# Altium PCB PCBProject_AdapterBoard_GaN.PcbDoc
Units mil, origin at the board's own origin, x right, y up, seen from the top; angles counter-clockwise.
Board outline 3052.53 x 2065.03 mil, 2 copper layers (Top Layer, Bottom Layer); 6 components, 24 nets, 122 pads, 11 vias.
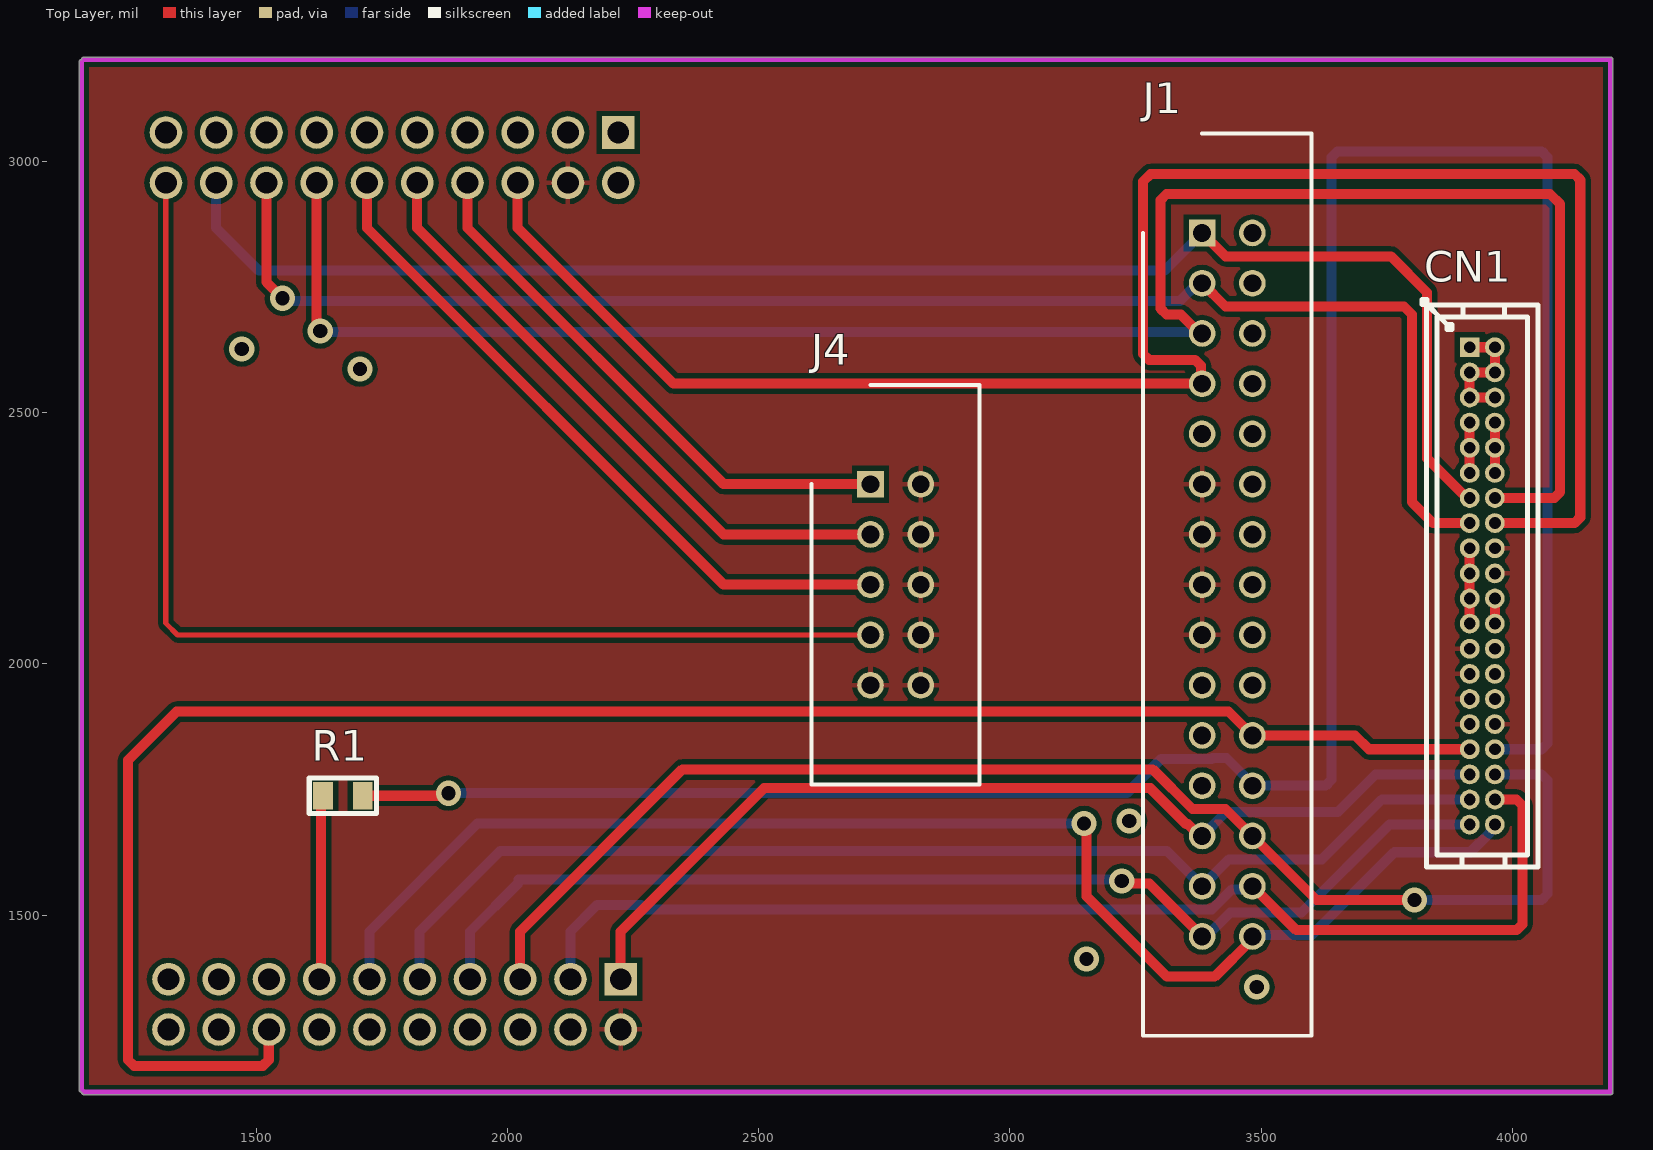
[diagram p0: Top Layer view]
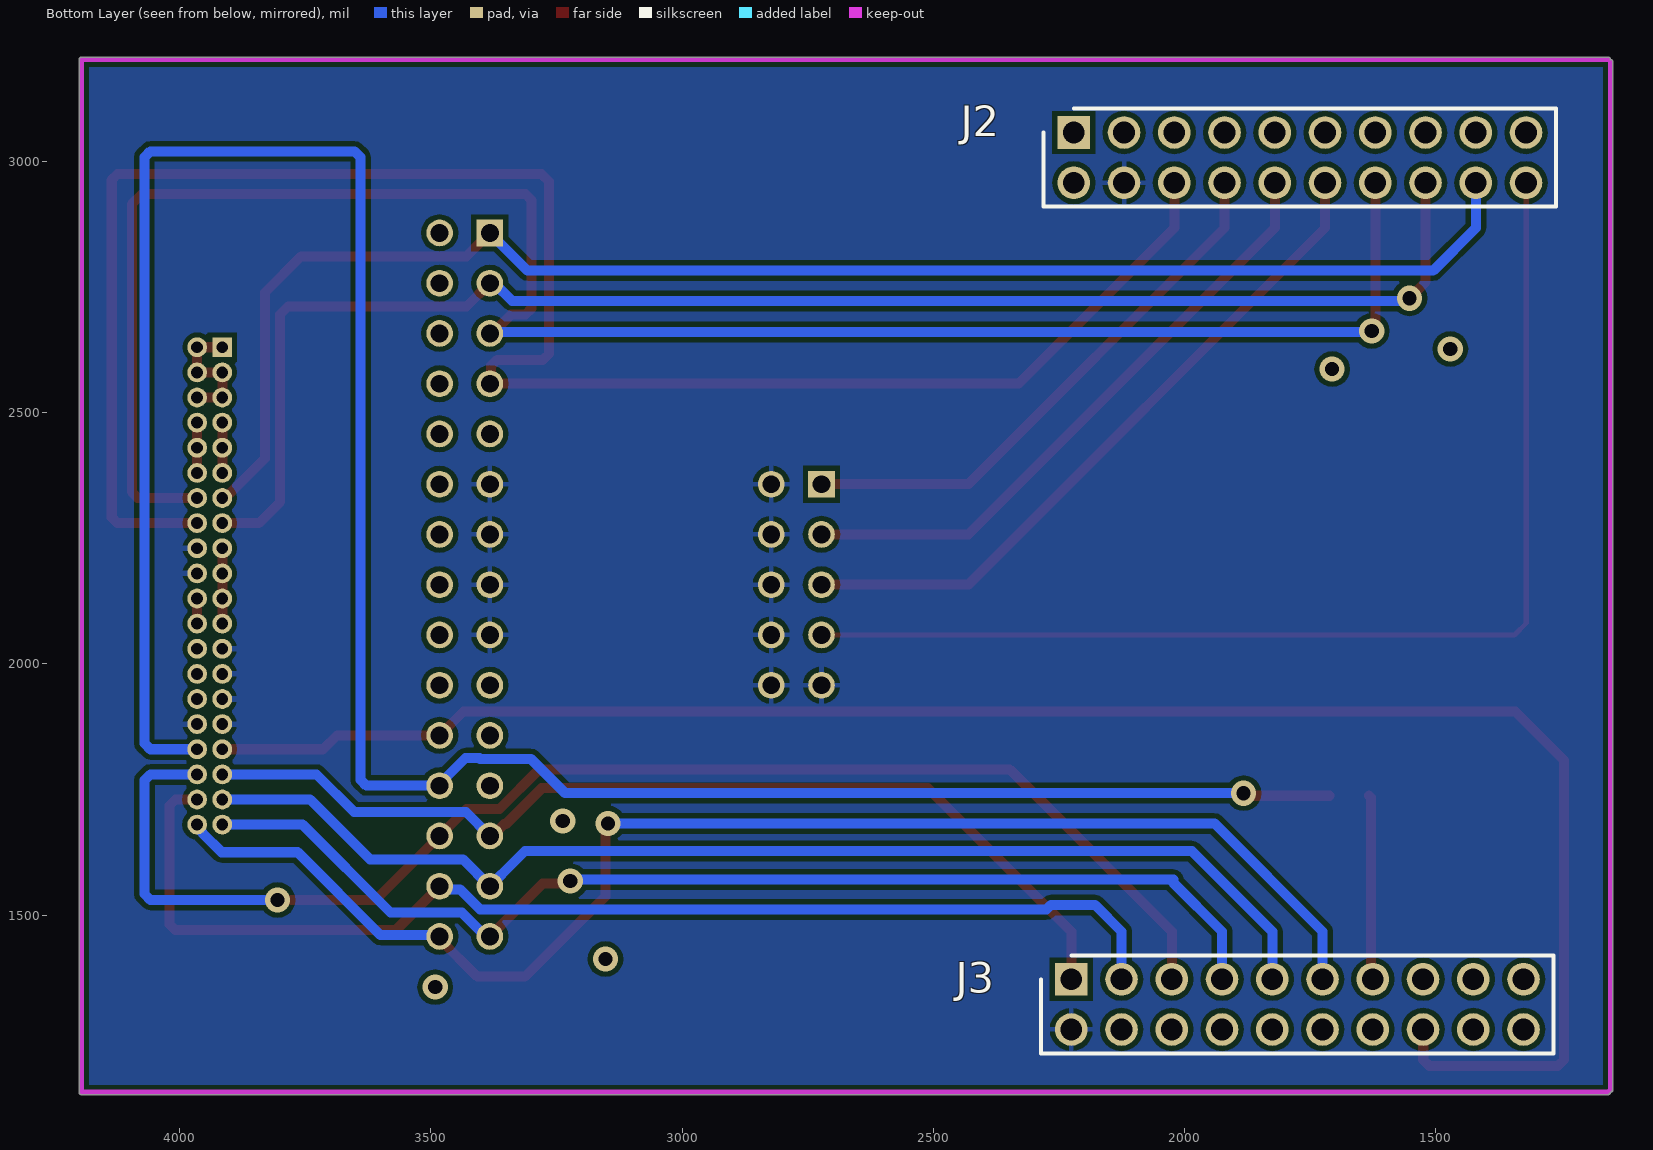
[diagram p1: Bottom Layer view, seen from below]

## Layer stack, top to bottom
Top Solder: solder mask 0.4, Solder Resist, Dk 3.5
Top Layer: signal copper 1.4
Dielectric 1: dielectric 12.6, FR-4, Dk 4.8
Bottom Layer: signal copper 1.4
Bottom Solder: solder mask 0.4, Solder Resist, Dk 3.5

## Board outline
1152.48,1147.48 cw(c1152.5,1152.5) 1147.48,1152.5 1147.48,3197.5 cw(c1152.5,3197.5) 1152.48,3202.51 cw(c1157.5,3202.5) 1157.5,3207.51 4195,3207.51 cw(c4195,3202.5) 4200.01,3202.5 4200.02,1147.5 cw(c4195,1147.5) 4195,1142.48 1157.5,1142.48 cw(c1157.5,1147.5)

## Design rules (kind name [scope] priority, off if disabled: settings)
Clearance [All] p1: gap=10 ignorepadtopadclearanceinfootprint=FALSE
MinimumSolderMaskSliver [All] p1: minsoldermaskwidth=2
PolygonConnect [All] p1: connectstyle=Relief reliefconductorwidth=10 reliefentries=4 polygonreliefangle="90 Angle" airgapwidth=10
RoutingVias [All] p1: holewidth=28 width=50 viastyle="Through Hole" minholewidth=28 minwidth=50 maxholewidth=28 maxwidth=50
SilkToSolderMaskClearance [IsPad] p1: minsilkscreentomaskgap=2 clearancetoexposedcopper=TRUE
SolderMaskExpansion [All] p1: expansion=4 istentingtop=FALSE
Width [All] p1: maxlimit=30 minlimit=10 preferedwidth=20
28 further rules are at their usual default settings.

## Classes and differential pairs
component class PCBProject_AdapterBoard_GaN: CN1 J2 J3 J4 R1

## Components (designator, comment, footprint, x,y, rotation, side; value= is the part's Value field where it differs from the comment)
CN1 "3131-40SG0BK00T1" IDC-TH_3131-40SG0BK00T1 3940,2155 r270 top
J1 "HIF3FC-30PA-2.54DSA_71_" SHDR30W50P254_2X15_4560X850X1200P 3382.5,2857.5 r270 top
J2 "SSQ-110-03-T-D-017" RHDR20W64P254_2X10_2591X495X851P 2220.4,3057.33 r0 bottom
J3 "SSQ-110-03-T-D-017" RHDR20W64P254_2X10_2591X495X851P 2225.4,1372.33 r0 bottom
J4 "HIF3FC-10PA-2.54DSA_71_" SHDR10W50P254_2X5_2020X850X920P 2722.5,2357.5 r270 top
R1 "0R" 0805 1672.5,1737.5 r180 top value=470R

## Footprints (in the part's own frame and the unit in brackets; to place one, negate y for a bottom-side part, rotate by r counter-clockwise, add the part's x,y. Pads: shape width x height; smd on the part's side, far side on the other; paste and mask are expansions set on the pad)
0805 [mm]
  rect 1x1.4 smd: 1(-1,0) 2(1,0)
  silkscreen extent -1.7,-0.9 1.7,0.9
IDC-TH_3131-40SG0BK00T1 [mm]
  rect 1x1 hole 0.6: 1(-12.065,-0.635)
  round 1 hole 0.6: 2(-12.065,0.635) 3(-10.795,-0.635) 4(-10.795,0.635) 5(-9.525,-0.635) 6(-9.525,0.635) 7(-8.255,-0.635) 8(-8.255,0.635) 9(-6.985,-0.635) 10(-6.985,0.635) 11(-5.715,-0.635) 12(-5.715,0.635) 13(-4.445,-0.635) 14(-4.445,0.635) 15(-3.175,-0.635) 16(-3.175,0.635) 17(-1.905,-0.635) 18(-1.905,0.635) 19(-0.635,-0.635) 20(-0.635,0.635) 21(0.635,-0.635) 22(0.635,0.635) 23(1.905,-0.635) 24(1.905,0.635) 25(3.175,-0.635) 26(3.175,0.635) 27(4.445,-0.635) 28(4.445,0.635) 29(5.715,-0.635) 30(5.715,0.635) 31(6.985,-0.635) 32(6.985,0.635) 33(8.255,-0.635) 34(8.255,0.635) 35(9.525,-0.635) 36(9.525,0.635) 37(10.795,-0.635) 38(10.795,0.635) 39(12.065,-0.635) 40(12.065,0.635)
  silkscreen extent -14.48,-3.05 14.2,2.82
RHDR20W64P254_2X10_2591X495X851P [mm]
  rect 1.65x1.65 hole 1.1: 1(0,0)
  round 1.65 hole 1.1: 2(0,2.54) 3(-2.54,0) 4(-2.54,2.54) 5(-5.08,0) 6(-5.08,2.54) 7(-7.62,0) 8(-7.62,2.54) 9(-10.16,0) 10(-10.16,2.54) 11(-12.7,0) 12(-12.7,2.54) 13(-15.24,0) 14(-15.24,2.54) 15(-17.78,0) 16(-17.78,2.54) 17(-20.32,0) 18(-20.32,2.54) 19(-22.86,0) 20(-22.86,2.54)
  silkscreen extent -24.39,-1.2 1.53,3.74, body extent -24.38,-1.2 1.53,3.74, height 8.51
SHDR10W50P254_2X5_2020X850X920P [mm]
  rect 1.35x1.35 hole 0.9: 1(0,0)
  round 1.35 hole 0.9: 2(0,2.54) 3(2.54,0) 4(2.54,2.54) 5(5.08,0) 6(5.08,2.54) 7(7.62,0) 8(7.62,2.54) 9(10.16,0) 10(10.16,2.54)
  silkscreen extent -5.02,-2.98 15.18,5.52, body extent -5.02,-2.98 15.18,5.52, height 9.2
SHDR30W50P254_2X15_4560X850X1200P [mm]
  rect 1.35x1.35 hole 0.9: 1(0,0)
  round 1.35 hole 0.9: 2(0,2.54) 3(2.54,0) 4(2.54,2.54) 5(5.08,0) 6(5.08,2.54) 7(7.62,0) 8(7.62,2.54) 9(10.16,0) 10(10.16,2.54) 11(12.7,0) 12(12.7,2.54) 13(15.24,0) 14(15.24,2.54) 15(17.78,0) 16(17.78,2.54) 17(20.32,0) 18(20.32,2.54) 19(22.86,0) 20(22.86,2.54) 21(25.4,0) 22(25.4,2.54) 23(27.94,0) 24(27.94,2.54) 25(30.48,0) 26(30.48,2.54) 27(33.02,0) 28(33.02,2.54) 29(35.56,0) 30(35.56,2.54)
  silkscreen extent -5.02,-2.98 40.58,5.52, body extent -5.02,-2.98 40.58,5.52, height 12

## Part data
CN1: "连接器类型:简牛座;每排PIN数:20;排数:2;间距:1.27mm;行距:1.27mm;封装形式:直插;触头材质:黄铜;触头镀层:金;", JLCPCB Part Class="Extended Part", LCSC Part Name="每排P数:20 排数:2 1.27mm", Manufacturer=Wcon(维峰电子), Add into BOM=yes, Connector Type=简牛座, Contact Material=黄铜, Contact Plating=金, Convert to PCB=yes, Datasheet=https://atta.szlcsc.com/upload/public/pdf/source/20210304/C976754_BF257D3FF426E047B764690466F062CF.pdf, Device=3131-40SG0BK00T1, Holder Type=直插, Manufacturer Part=3131-40SG0BK00T1, Name=3131-40SG0BK00T1, Number of Rows=2, Pin Number in each Row=20, Pitch=1.27mm, Row Spacing=1.27mm, Supplier=LCSC, Supplier Footprint=插件,P=1.27mm, Supplier Part=C976754, Symbol=3131-40SG0BK00T1
J1: "Connector", Manufacturer_Name=Hirose, Manufacturer_Part_Number=HIF3FC-30PA-2.54DSA(71), Mouser Part Number=798-HIF3FC30PA254D71, Datasheet Link=https://datasheet.datasheetarchive.com/originals/distributors/SFDatasheet-7/sf-000141320.pdf, Height=12mm, Mouser Price/Stock=https://www.mouser.co.uk/ProductDetail/Hirose-Connector/HIF3FC-30PA-254DSA71?qs=eDUdFcBPps32%2FyAdBVx6ww%3D%3D
J2 J3: "Connector", Manufacturer_Name=SAMTEC, Datasheet Link=http://suddendocs.samtec.com/catalog_english/ssq_th.pdf, Height=8.51mm, Manufacturer_Part_Number=SSQ-110-03-T-D-017
J4: "Connector", Manufacturer_Name=Hirose, Manufacturer_Part_Number=HIF3FC-10PA-2.54DSA(71), Mouser Part Number=798-HIF3FC10PA254D71, Datasheet Link=https://componentsearchengine.com/Datasheets/1/HIF3FC-10PA-2.54DSA(71).pdf, Height=9.2mm, Mouser Price/Stock=https://www.mouser.co.uk/ProductDetail/Hirose-Connector/HIF3FC-10PA-2.54DSA71?qs=eDUdFcBPps26f2LJxn%252B8VA%3D%3D, System=Connector
R1: library part Res2_5, "Resistor", LatestRevisionDate=17-Jul-2002, LatestRevisionNote="Re-released for DXP Platform.", PackageReference=AXIAL-0.4, Published=8-Jun-2000, Publisher="Altium Limited"

## Via types
v1: diameter 50, hole 28, Top Layer to Bottom Layer, 11 vias

## Nets (pads, with @x,y where several pads share a name; then routed paths per layer and width w, separated by ;. In a path a pad name is that pad's centre, name@x,y a point inside that pad or via, vN(x,y) a via of type N, cw(c..) or ccw(c..) an arc to the next point about the centre after c; other vN are vias at no path point)
3V3: J2.1
AGND: CN1.18 CN1.20 CN1.25 CN1.27 CN1.29 CN1.31 CN1.32 J1.11 J1.13 J1.15 J1.17 J2.4 J3.2 J4.2 J4.4 J4.6 J4.8 J4.9 J4.10
D12V1: CN1.1 CN1.2 CN1.3 CN1.4 CN1.5 CN1.6 | length 250
  Top Layer w20: CN1.1 CN1.2 CN1.4 CN1.3 CN1.5 CN1.6
DSP-PWM1A: CN1.35 J1.25 J3.1 | length 1992.8
  Top Layer w20: J3.1 2225.4,1467.33 2510.57,1752.5 3279.21,1752.5 3350.78,1680.93 3354.21,1680.93 3377.63,1657.5 J1.25
  Bottom Layer w20: J1.25 3430,1705 3652.38,1705 3727.38,1780 CN1.35
DSP-PWM1B: CN1.38 J1.28 J3.3 | length 2371.8
  Top Layer w20: J1.28 3570,1470 4008.28,1470 4020,1481.72 4020,1718.28 4008.28,1730 CN1.38
  Bottom Layer w20: J3.3 2125.4,1467.33 2177.88,1519.81 2266.17,1519.81 2275.05,1510.93 3401.79,1510.93 3442.02,1551.16 3476.16,1551.16 J1.28
DSP-PWM2A: CN1.36 J1.26 J3.5 | length 2722.2
  Top Layer w20: J3.5 2025.4,1467.33 2348.07,1790 3284.13,1790 3363.21,1710.93 3429.07,1710.93 J1.26 3610,1530 v1(3805,1530)
  Bottom Layer w20: v1(3805,1530) 4058.28,1530 4070,1541.72 4070,1768.28 4058.28,1780 CN1.36
DSP-PWM2B: CN1.39 J1.29 J3.7 | length 2270.3
  Top Layer w20: v1(3222.5,1567.5) 3227.5,1562.5 3277.5,1562.5 J1.29
  Bottom Layer w20: J3.7 1925.4,1467.33 2022.5,1564.43 2022.5,1570.78 3219.22,1570.78 v1(3222.5,1567.5) ; J1.29 3390.79,1457.5 3438.29,1505 3580,1505 3755,1680 CN1.39
DSP-PWM3A: CN1.37 J1.27 J3.9 | length 2351.4
  Bottom Layer w20: J3.9 1825.4,1467.33 1985.57,1627.5 3312.5,1627.5 3332.5,1607.5 J1.27 3435.93,1610.93 3620.93,1610.93 3740,1730 CN1.37
DSP-PWM3B: CN1.40 J1.30 J3.11 | length 2763.9
  Top Layer w20: v1(3147.5,1682.5) 3152.5,1677.5 3152.5,1537.5 3312.5,1377.5 3407.5,1377.5 3482.5,1452.5 J1.30
  Bottom Layer w20: J3.11 1725.4,1467.33 1940.57,1682.5 v1(3147.5,1682.5) ; J1.30 3485,1460 3600,1460 3765,1625 3916.12,1625 3954.68,1663.56 3954.68,1664.44 3965,1674.76 CN1.40
DSP_PWM1_ENABLE: CN1.33 J1.22 J3.16 | length 3688.2
  Top Layer w20: J3.16 1525,1271.93 1525,1211.72 1513.28,1200 1256.72,1200 1245,1211.72 1245,1808.28 1341.72,1905 3435,1905 J1.22 3686.86,1857.5 3714.36,1830 CN1.33
DSP_PWM1_F\A\U\L\T\_\5\V\: CN1.34 J1.24 R1.1 | length 4943.9
  Top Layer w20: R1.1 1877.5,1737.5 v1(1882.5,1742.5)
  Bottom Layer w20: v1(1882.5,1742.5) 3232.5,1742.5 3300.93,1810.93 3401.79,1810.93 3403.37,1812.5 3430.78,1812.5 3482.5,1760.78 J1.24 3628.28,1757.5 3640,1769.22 3640,3008.28 3651.72,3020 4058.28,3020 4070,3008.28 4070,1841.72 4058.28,1830 CN1.34
IPM_IU1: CN1.14 J1.5 J2.14 | length 3890.6
  Top Layer w20: J2.14 1620.4,2677.72 1627.5,2670.62 v1(1627.5,2662.5) ; J1.5 3377.49,2657.5 3339.99,2695 3311.72,2695 3300,2706.72 3300,2923.28 3311.72,2935 4075,2935 4095,2915 4095,2341.72 4083.28,2330 CN1.14
  Bottom Layer w20: v1(1627.5,2662.5) 1630,2660 3380,2660 J1.5
IPM_IV1: CN1.15 J1.3 J2.16 | length 3129.1
  Top Layer w20: v1(1552.5,2727.5) 1520.4,2759.6 1520.4,2867.33 ; J1.3 3429.07,2710.93 3784.07,2710.93 3800,2695 3800,2321.72 3841.72,2280 CN1.15 ; 1520.4,2867.33 1520.23,2867.5 1520.23,2957.5 J2.16 1520.4,2867.33
  Bottom Layer w20: v1(1552.5,2727.5) 1557.5,2722.5 3338.53,2722.5 3373.53,2757.5 J1.3
IPM_IW1: CN1.13 J1.1 J2.18 | length 3062.8
  Top Layer w20: J1.1 3429.07,2810.93 3758.28,2810.93 3830,2739.21 3830,2408.88 3898.56,2340.32 3899.44,2340.32 3909.76,2330 CN1.13
  Bottom Layer w20: J2.18 1420.4,2867.33 1505.23,2782.5 3307.5,2782.5 J1.1
IPM_VDC_BUS1: CN1.16 J1.7 J2.6 | length 3812.7
  Top Layer w20: J2.6 2020.4,2867.33 2330.23,2557.5 J1.7 3380,2560 3380,2593.28 3368.28,2605 3276.72,2605 3265,2616.72 3265,2960 3280,2975 4123.28,2975 4135,2963.28 4135,2291.72 4123.28,2280 CN1.16
NetCN1_7: CN1.7 CN1.9 CN1.11 | length 100
  Top Layer w20: CN1.11 CN1.9 CN1.7
NetCN1_8: CN1.8 CN1.10 CN1.12 | length 100
  Top Layer w20: CN1.12 CN1.10 CN1.8
NetCN1_17: CN1.17 CN1.19 CN1.21 CN1.23 | length 150
  Top Layer w20: CN1.23 CN1.21 CN1.19 CN1.17
NetCN1_22: CN1.22 CN1.24 | length 50
  Top Layer w20: CN1.24 CN1.22
OT: J3.13 R1.2 | length 366.8
  Top Layer w20: J3.13@1629.27,1372.33 1629.27,1733.64 R1.2
VA: J2.8 J4.1 | length 1103.3
  Top Layer w20: J2.8 1920.4,2867.33 2430.23,2357.5 J4.1
VB: J2.10 J4.3 | length 1244.7
  Top Layer w20: J2.10 1820.4,2867.33 2430.23,2257.5 J4.3
VC: J2.12 J4.5 | length 1386.1
  Top Layer w20: J2.12 1720.4,2867.33 2430.23,2157.5 J4.5
VREF: J2.20 J4.7 | length 2288.8
  Top Layer w10: J2.20 1320,2956.93 1320,2080.86 1343.36,2057.5 J4.7
pads on no net: CN1.26 CN1.28 CN1.30 J1.2 J1.4 J1.6 J1.8 J1.9 J1.10 J1.12 J1.14 J1.16 J1.18 J1.19 J1.20 J1.21 J1.23 J2.2 J2.3 J2.5 J2.7 J2.9 J2.11 J2.13 J2.15 J2.17 J2.19 J3.4 J3.6 J3.8 J3.10 J3.12 J3.14 J3.15 J3.17 J3.18 J3.19 J3.20
copper on no net:
  other v1: 3491.23,1356.54 3152.5,1412.5 3237.5,1687.5 1706.23,2586.54 1471.23,2626.54

## Polygon pours and split planes (outlines as drawn)
AGND on Bottom Layer "AGND_L02_P000" (solid, remove dead copper, pour order 0): 1157.5,3202.5 4195,3202.5 4195,1147.5 4192.5,1150 1155,1150 1155,3200 1157.5,3202.5 1155,3205 1155,3200
AGND on Top Layer "AGND_L01_P001" (solid, remove dead copper, pour order 1): 1157.5,3202.5 4195,3202.5 4195,1147.5 1157.5,1147.5 1157.5,3192.5 1152.5,3197.5

## Keep-outs
Keep-Out Layer:
  lines w10: 1152.5,3197.5 1152.5,1152.5 1157.5,1147.5 4195,1147.5 4195,3202.5 1157.5,3202.5